# EAGLE board BNC-Ifyer_PCB (EAGLE 9.7.0)
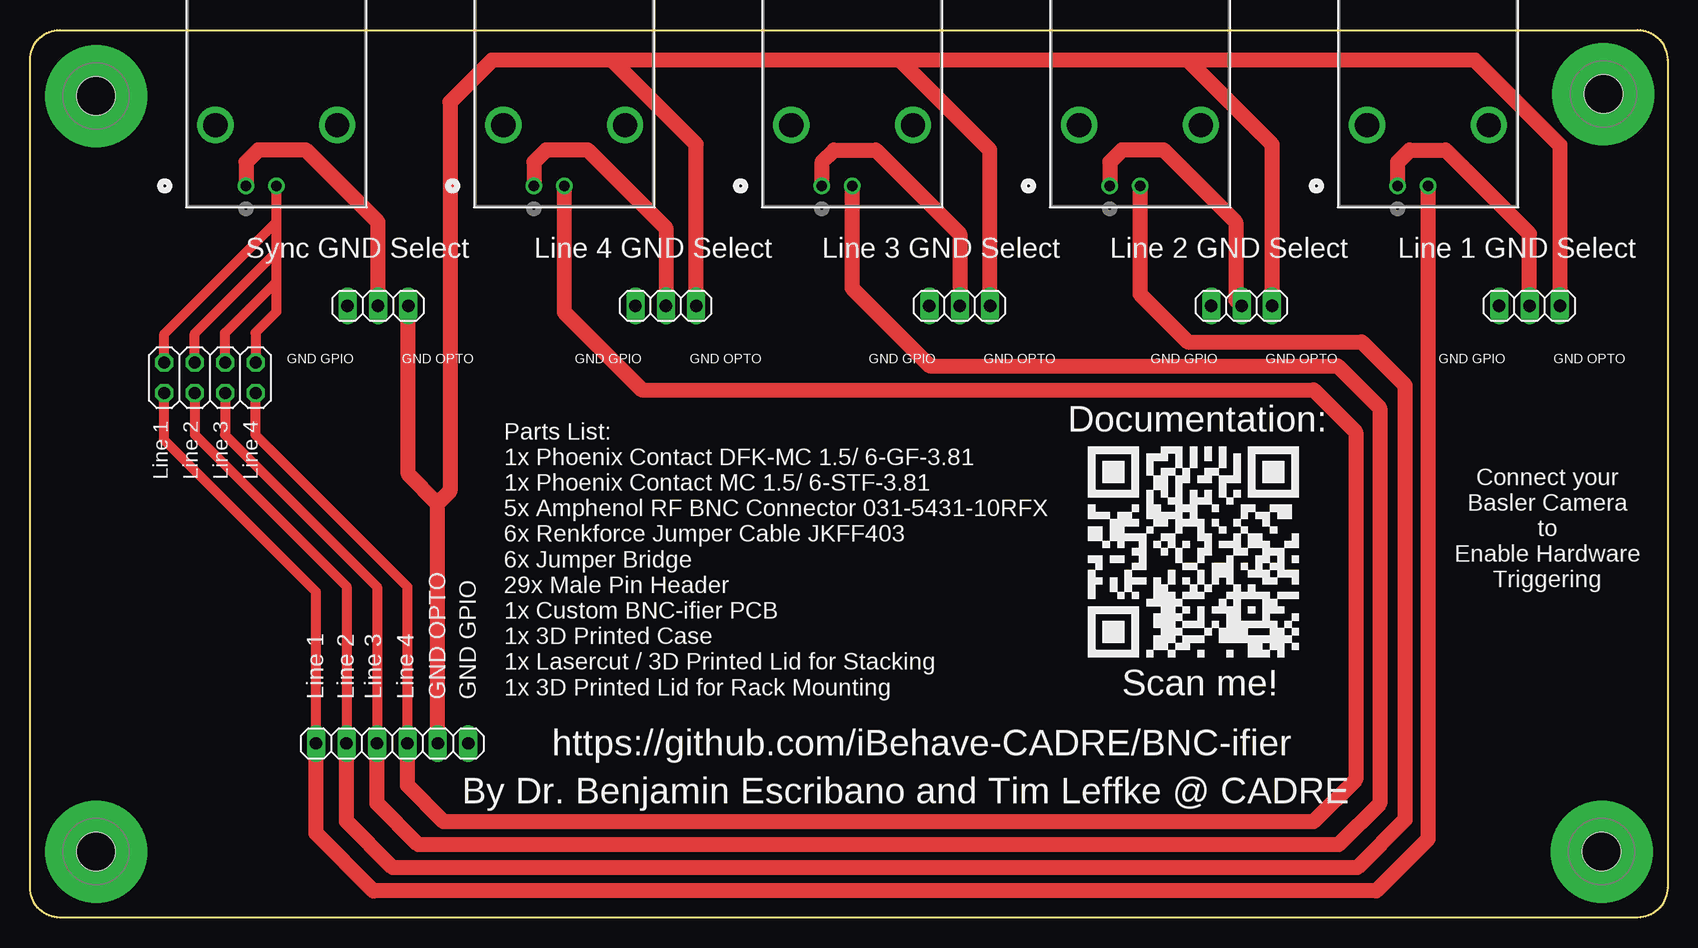
[diagram p0: board, top side]
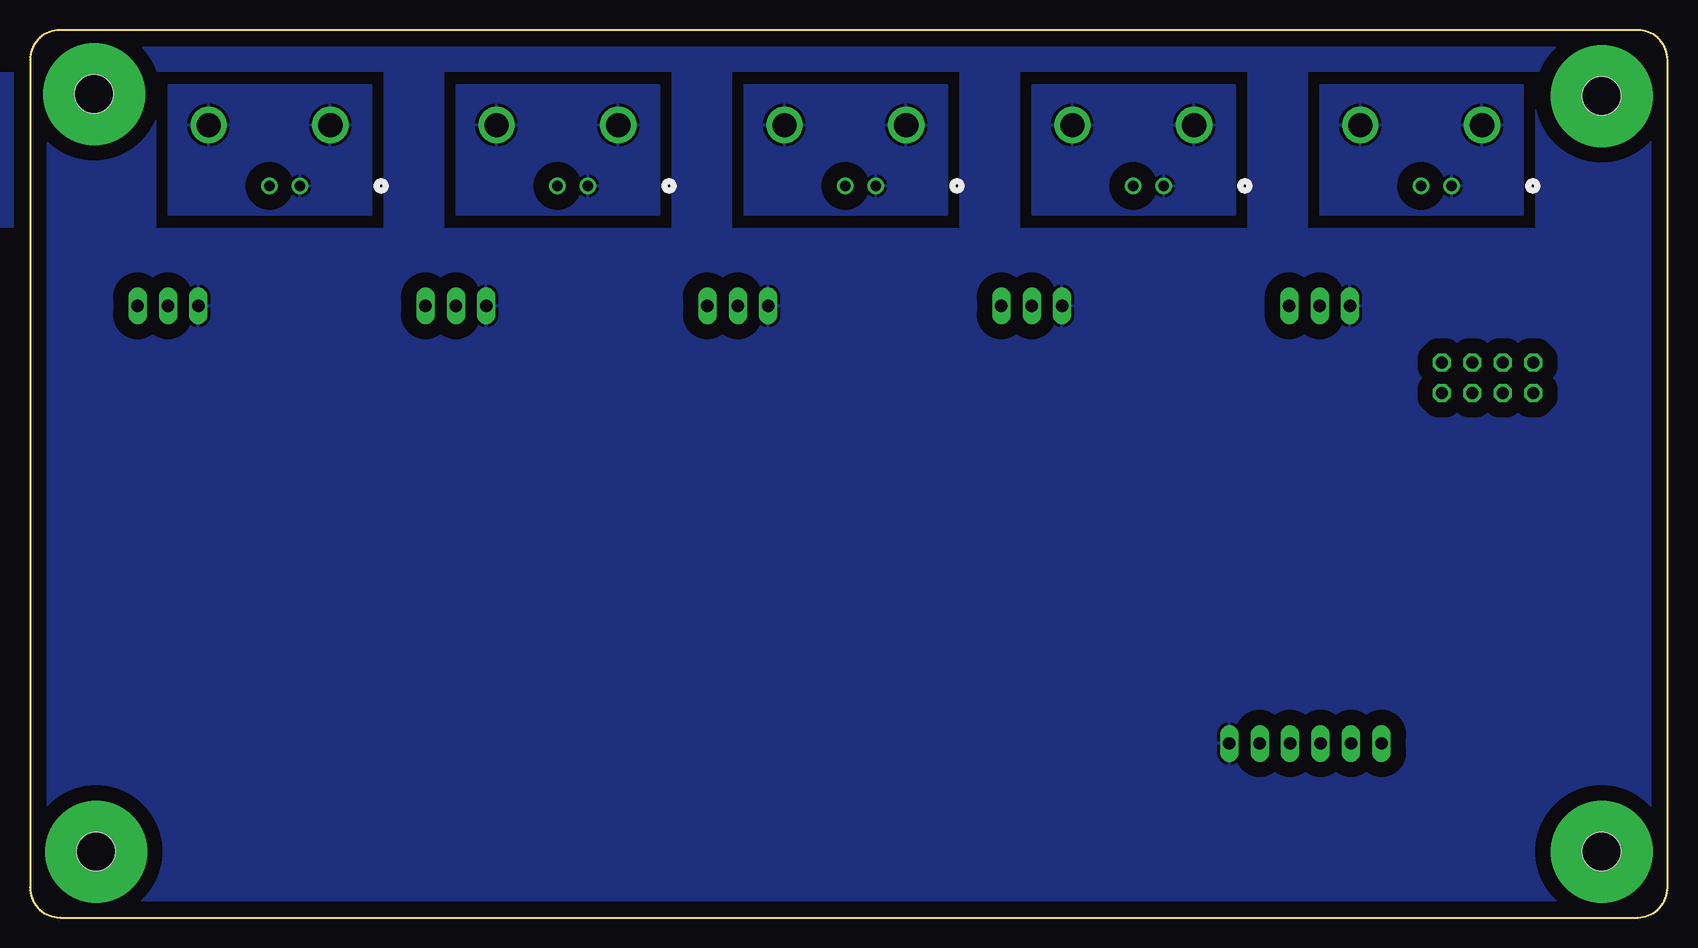
[diagram p1: board, bottom side, seen from below]

Size 136.5 x 74 mm. Coordinates in mm from the lower left corner, seen from the top.
Outline: 0,71.5 arc-90 2.5,74 134,74 arc-90 136.5,71.5 136.5,2.5 arc-90 134,0 2.5,0 arc-90 0,2.5 0,71.5
Copper layers (1*16): Top 0.035mm / dielectric 1.5mm / Bottom 0.035mm
Design rules "Fusion Electronics Design Rules": minimum track width 6mil, minimum drill 0.35mm, track to track 6mil, track to pad 6mil, pad to pad 6mil, via to via 6mil, smd to smd 6mil, copper to edge 40mil, drill to drill 6mil, minimum pad ring 10mil, minimum via ring 8mil, stop-mask expansion 4mil, vias tented up to drill 0mil, thermal gap 10mil

## Footprints (pad centres in the part's own frame; a part is rotated, then mirrored left to right if it is on the bottom)
1X06 = drill 1.016 long: 1 -6.35,0; 2 -3.81,0; 3 -1.27,0; 4 1.27,0; 5 3.81,0; 6 6.35,0
CONN_031-5431-10RFX_AMP = drill 0.889 pad 1.397: 1 0,0; 2 2.54,0 | drill 2.007 pad 2.007: 3 -2.54,5.08; 4 7.62,5.08
1X03 = drill 1.016 long: 1 -2.54,0; 2 0,0; 3 2.54,0
STANDOFF_HEX_FEMALE_550X1800_M3X0.5_MTGP850H320 = drill 3.2 pad 8.5: 1 0,0 | hole 3.2: 0,0
2X04 = drill 1.016 octagon: 1 -3.81,-1.27; 2 -3.81,1.27; 3 -1.27,-1.27; 4 -1.27,1.27; 5 1.27,-1.27; 6 1.27,1.27; 7 3.81,-1.27; 8 3.81,1.27

## Placement (x,y rotation side)
HEADER  PINHD-1X6  [1X06]  30.19,14.51 0 top
LINE_1  031-5431-10RFXCONN_031-5431-10RFX_AMP  [CONN_031-5431-10RFX_AMP]  114,61 0 top
LINE_1_GROUND_SELECT  PINHD-1X03_1X03M  [1X03]  125,51 180 top
LINE_2  031-5431-10RFXCONN_031-5431-10RFX_AMP  [CONN_031-5431-10RFX_AMP]  90,61 0 top
LINE_2_GROUND_SELECT  PINHD-1X03_1X03M  [1X03]  101,51 180 top
LINE_3  031-5431-10RFXCONN_031-5431-10RFX_AMP  [CONN_031-5431-10RFX_AMP]  66,61 0 top
LINE_3_GROUND_SELECT  PINHD-1X03_1X03M  [1X03]  77.5,51 180 top
LINE_4  031-5431-10RFXCONN_031-5431-10RFX_AMP  [CONN_031-5431-10RFX_AMP]  42,61 0 top
LINE_4_GROUND_SELECT  PINHD-1X03_1X03M  [1X03]  53,51 180 top
LINE_OUT  031-5431-10RFXCONN_031-5431-10RFX_AMP  [CONN_031-5431-10RFX_AMP]  18,61 0 top
LINE_OUT_GROUND_SELECT  PINHD-1X03_1X03M  [1X03]  29,51 0 top
MP1  M3-18MM  [STANDOFF_HEX_FEMALE_550X1800_M3X0.5_MTGP850H320]  5.5,68.5 0 top
MP2  M3-18MM  [STANDOFF_HEX_FEMALE_550X1800_M3X0.5_MTGP850H320]  131.16,68.66 0 top
MP3  M3-18MM  [STANDOFF_HEX_FEMALE_550X1800_M3X0.5_MTGP850H320]  131,5.5 0 top
MP4  M3-18MM  [STANDOFF_HEX_FEMALE_550X1800_M3X0.5_MTGP850H320]  5.5,5.5 0 top
OUT_SELECTOR  PINHD-2X4  [2X04]  15,45 180 top

## Library data of the parts
HEADER = Connector; CATEGORY: Headers; DESCRIPTION: Header, Straight, 6 Position; MANUFACTURER: Generic; MPN: Generic; OPERATING_TEMPERATURE: Generic; PART_STATUS: Active; PITCH: 0.100" (2.54mm); ROHS_COMPLIANCE: Generic; SERIES: Generic; SUB-CATEGORY: Headers, Male Pins; TYPE: Board to Board or Cable, Unshrouded, Through Hole, Straight
LINE_1-LINE_4 LINE_OUT = Group Electornics Library; COPYRIGHT: Copyright (C) 2024 Ultra Librarian. All rights reserved.; MANUFACTURER_PART_NUMBER: 031-5431-10RFX; MFR_NAME: Amphenol ICC
LINE_1_GROUND_SELECT LINE_2_GROUND_SELECT LINE_3_GROUND_SELECT LINE_4_GROUND_SELECT LINE_OUT_GROUND_SELECT = Tinkercad
MP1-MP4 = PCB-Fasteners_Hardware; CATEGORY: Standoff/Spacer; SUB-CATEGORY: Female-Female
OUT_SELECTOR = Connector; CATEGORY: Headers; DESCRIPTION: Header-Straight-2x4 Position; PACKAGE_TYPE: THT; PITCH: 0.100" (2.54mm); SUBCATEGORY: Headers-Male Pins; TYPE: Board to Board or Cable-Unshrouded-Through Hole-Straight

## Nets
GND_GPIO: HEADER.6 LINE_1_GROUND_SELECT.3 LINE_2_GROUND_SELECT.3 LINE_3_GROUND_SELECT.3 LINE_4_GROUND_SELECT.3 LINE_OUT_GROUND_SELECT.1
GND_LINE_1: LINE_1.1 LINE_1.3 LINE_1.4 LINE_1_GROUND_SELECT.2
GND_LINE_2: LINE_2.1 LINE_2.3 LINE_2.4 LINE_2_GROUND_SELECT.2
GND_LINE_3: LINE_3.1 LINE_3.3 LINE_3.4 LINE_3_GROUND_SELECT.2
GND_LINE_4: LINE_4.1 LINE_4.3 LINE_4.4 LINE_4_GROUND_SELECT.2
GND_OPTO: HEADER.5 LINE_1_GROUND_SELECT.1 LINE_2_GROUND_SELECT.1 LINE_3_GROUND_SELECT.1 LINE_4_GROUND_SELECT.1 LINE_OUT_GROUND_SELECT.3
GND_OUT: LINE_OUT.1 LINE_OUT.3 LINE_OUT.4 LINE_OUT_GROUND_SELECT.2
SIGNAL_LINE_1: HEADER.1 LINE_1.2 OUT_SELECTOR.8
SIGNAL_LINE_2: HEADER.2 LINE_2.2 OUT_SELECTOR.6
SIGNAL_LINE_3: HEADER.3 LINE_3.2 OUT_SELECTOR.4
SIGNAL_LINE_4: HEADER.4 LINE_4.2 OUT_SELECTOR.2
SIGNAL_OUT: LINE_OUT.2 OUT_SELECTOR.1 OUT_SELECTOR.3 OUT_SELECTOR.5 OUT_SELECTOR.7

## Tracks (layer width: path | path; a pad name or v marks a point on that pad's centre or on a via)
GND_GPIO
  pour Bottom (isolate 1.27): 19.03,1.08 141.92,1.08 141.92,57.42 17.08,57.42 17.08,3.03
  pour Bottom (isolate 1.27): 30.08,57.58 34.92,57.58 34.92,74.42 30.08,74.42
  pour Bottom (isolate 1.27): 78.08,57.58 82.92,57.58 82.92,74.42 78.08,74.42
  pour Bottom (isolate 1.27): 54.08,57.58 58.92,57.58 58.92,74.42 54.08,74.42
  pour Bottom (isolate 1.27): 1.08,56.58 17.92,56.58 17.92,57.42 1.08,57.42
  pour Bottom (isolate 1.27): 1.08,57.58 10.92,57.58 10.92,68.42 1.08,68.42
  pour Bottom (isolate 1.27): 1.08,1.08 19.92,1.08 19.92,15.92 1.08,15.92
  pour Bottom (isolate 1.27): 4.08,70.58 29.92,70.58 29.92,74.42 4.08,74.42
  pour Bottom (isolate 1.27): 35.08,70.58 53.92,70.58 53.92,74.42 35.08,74.42
  pour Bottom (isolate 1.27): 59.08,70.58 77.92,70.58 77.92,74.42 59.08,74.42
  pour Bottom (isolate 1.27): 83.08,70.58 134.92,70.58 134.92,74.42 83.08,74.42
  pour Bottom (isolate 1.27): 1.08,16.08 17.92,16.08 17.92,56.42 1.08,56.42
  pour Bottom (isolate 1.27): 102.08,57.58 106.92,57.58 106.92,70.42 102.08,70.42
  pour Bottom (isolate 1.27): 126.08,57.58 141.92,57.58 141.92,70.42 126.08,70.42
GND_LINE_1
  Top 1.27: LINE_1_GROUND_SELECT.2 124.99,57.01 118,64 115,64 114,63 LINE_1.1
  pour Bottom (isolate 1.27): 108.08,58.58 124.92,58.58 124.92,69.42 108.08,69.42
GND_LINE_2
  Top 1.27: LINE_2_GROUND_SELECT.2 100.5,51.5 100.5,58 94.5,64 91,64 90,63 LINE_2.1
  pour Bottom (isolate 1.27): 84.08,58.58 100.92,58.58 100.92,69.42 84.08,69.42
GND_LINE_3
  Top 1.27: LINE_3.1 66.03,63.03 67,64 70.5,64 77.5,57 LINE_3_GROUND_SELECT.2
  pour Bottom (isolate 1.27): 60.08,58.58 76.92,58.58 76.92,69.42 60.08,69.42
GND_LINE_4
  Top 1.27: LINE_4_GROUND_SELECT.2 53,57.5 46.5,64 43,64 42,63 LINE_4.1
  pour Bottom (isolate 1.27): 36.08,58.58 52.92,58.58 52.92,69.42 36.08,69.42
GND_OPTO
  Top 1.27: 96.5,71.5 120.44,71.5 127.54,64.4 LINE_1_GROUND_SELECT.1 | HEADER.5 34,34.5 | 34,34.5 34,34.54 35,35.54 35,68 38.5,71.5 48.5,71.5 | 96.5,71.5 72.5,71.5 | 72.5,71.5 48.5,71.5 | LINE_2_GROUND_SELECT.1 103.54,64.46 96.5,71.5 | LINE_3_GROUND_SELECT.1 80,51.04 80,64 72.5,71.5 | LINE_4_GROUND_SELECT.1 55.54,64.46 48.5,71.5 | 34,34.5 31.54,36.96 LINE_OUT_GROUND_SELECT.3
GND_OUT
  Top 1.27: LINE_OUT_GROUND_SELECT.2 29,58 23,64 19,64 18,63 LINE_OUT.1
  pour Bottom (isolate 1.27): 12.08,58.58 28.92,58.58 28.92,69.42 12.08,69.42
SIGNAL_LINE_1
  Top 0.813: 23.84,14 23.84,27.16 11.19,39.81 OUT_SELECTOR.8
  Top 1.27: LINE_1.2 116.54,6.54 112.23,2.23 28.62,2.23 23.84,7.01 23.84,14 HEADER.1
SIGNAL_LINE_2
  Top 0.813: HEADER.2 26.38,27.62 13.73,40.27 OUT_SELECTOR.6
  Top 1.27: HEADER.2 26.38,8.01 30.24,4.15 110.64,4.15 114.62,8.13 114.62,44.38 111,48 96.5,48 92.54,51.96 LINE_2.2
SIGNAL_LINE_3
  Top 0.813: 28.92,13.5 28.92,27.58 16.27,40.23 OUT_SELECTOR.4
  Top 1.27: LINE_3.2 68.54,52.47 75.01,45.99 109.01,45.99 112.5,42.5 112.5,9.5 109.07,6.07 32.36,6.07 28.92,9.51 28.92,13.5 HEADER.3
SIGNAL_LINE_4
  Top 0.813: HEADER.4 31.46,27.58 18.81,40.23 OUT_SELECTOR.2
  Top 1.27: LINE_4.2 44.54,50.46 51,44 107,44 110.5,40.5 110.5,11.5 106.99,7.99 34.47,7.99 31.46,11.01 HEADER.4
SIGNAL_OUT
  Top 0.813: LINE_OUT.2 20.54,58 | 20.54,58 20.54,55.5 | 20.54,55.5 20.54,53 | 20.54,53 20.54,50.5 18.81,48.77 OUT_SELECTOR.1 | OUT_SELECTOR.3 16.27,48.73 20.54,53 | OUT_SELECTOR.5 13.73,48.69 20.54,55.5 | OUT_SELECTOR.7 11.19,48.65 20.54,58

## Text on the board
tPlace: Sync GND Select | Line 4 GND Select | Line 3 GND Select | Line 2 GND Select | Line 1 GND Select | GND GPIO | GND OPTO | GND GPIO | GND OPTO | GND GPIO | GND OPTO | GND GPIO | GND OPTO | GND GPIO | GND OPTO | Line 1 | Line 2 | Line 3 | Line 4
tNames: Documentation: | Connect your / Basler Camera / to / Enable Hardware / Triggering | Line 1 | Line 2 | Line 3 | Line 4 | GND OPTO | GND GPIO | Parts List: / 1x Phoenix Contact DFK-MC 1.5/ 6-GF-3.81 / 1x Phoenix Contact MC 1.5/ 6-STF-3.81 / 5x Amphenol RF BNC Connector 031-5431-10RFX / 6x Renkforce Jumper Cable JKFF403 / 6x Jumper Bridge / 29x Male Pin Header / 1x Custom BNC-ifier PCB / 1x 3D Printed Case / 1x Lasercut / 3D Printed Lid for Stacking / 1x 3D Printed Lid for Rack Mounting | Scan me! | https://github.com/iBehave-CADRE/BNC-ifier | By Dr. Benjamin Escribano and Tim Leffke @ CADRE